# Altium PCB PCB.PcbDoc
Units mm, origin at the board's own origin, x right, y up, seen from the top; angles counter-clockwise.
Board outline 16.51 x 12.83 mm, 2 copper layers (Top Layer, Bottom Layer); 7 components, 6 nets, 26 pads, 18 vias.
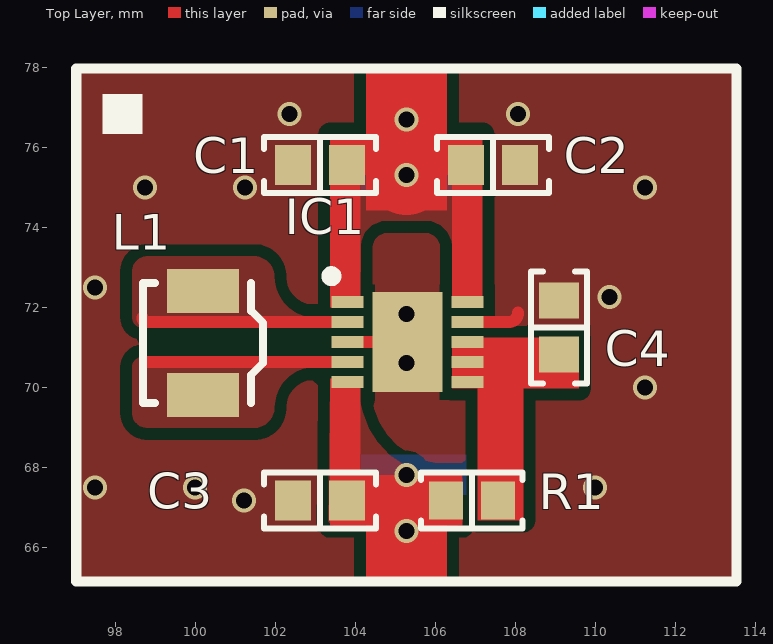
[diagram p0: Top Layer view]
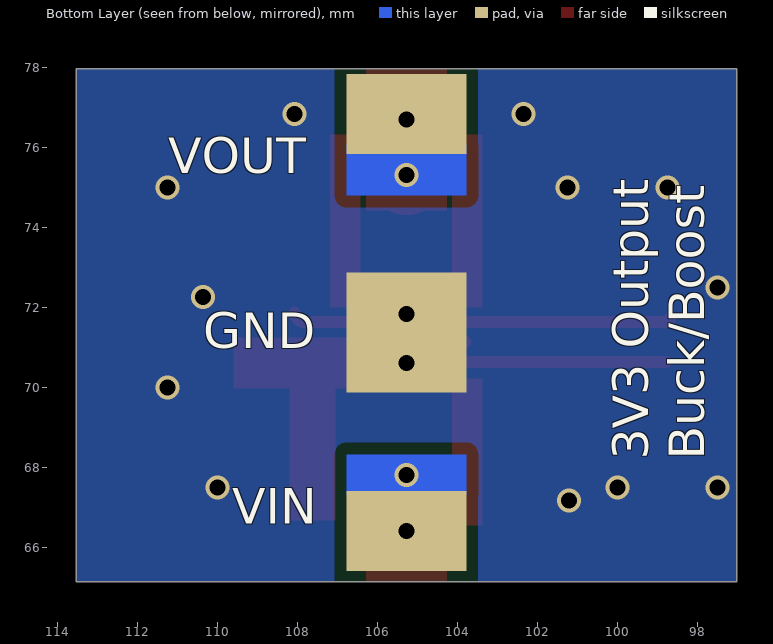
[diagram p1: Bottom Layer view, seen from below]
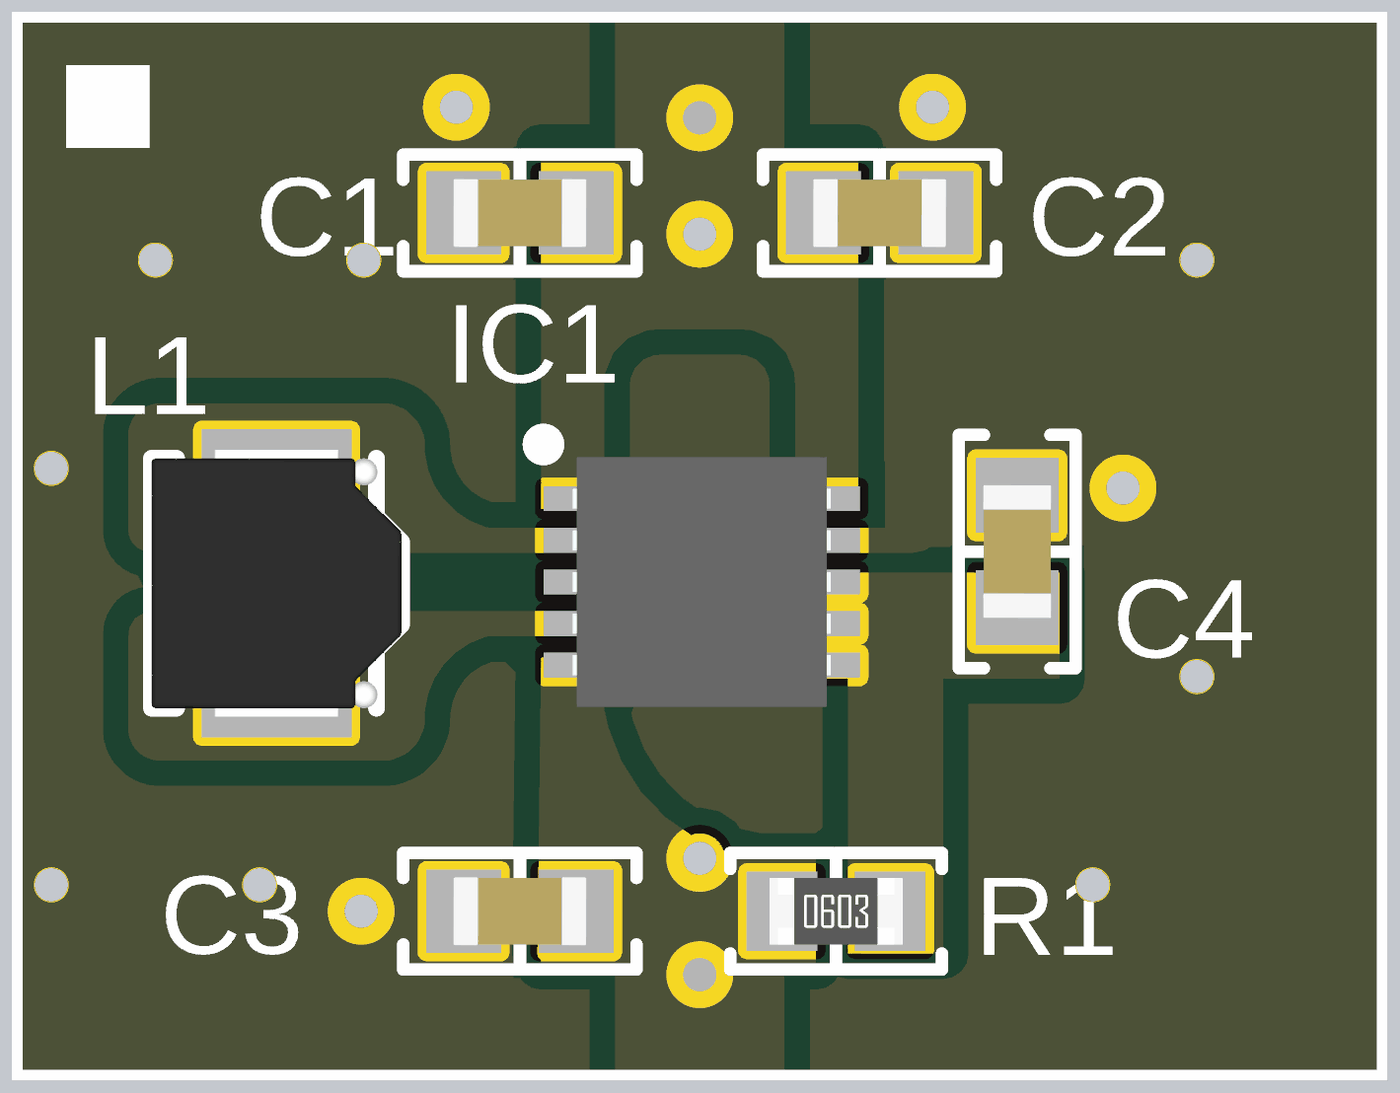
[diagram p2: 3D render of the assembled board from above, using the file's embedded part models]

## Layer stack, top to bottom
Top Solder: solder mask 0.0102, Solder Resist, Dk 3.5
Top Layer: signal copper 0.0356
Dielectric 1: dielectric 0.32, FR-4, Dk 4.8
Bottom Layer: signal copper 0.0356
Bottom Solder: solder mask 0.0102, Solder Resist, Dk 3.5

## Board outline
97.028,65.151 113.538,65.151 113.538,77.978 97.028,77.978

## Design rules (kind name [scope] priority, off if disabled: settings)
Clearance POL [All vs InPolygon] p1: gap=0.3 ignorepadtopadclearanceinfootprint=FALSE
Clearance [All] p2: gap=0.2 ignorepadtopadclearanceinfootprint=FALSE
HoleSize [All] p1: absolutevalues=TRUE maxlimit=2.54 minlimit=0.4 maxpercent=80.000 minpercent=20.000
PlaneClearance [All] p1: clearance=0.3
PlaneConnect [All] p1: planeconnectstyle=Direct reliefexpansion=0.508 reliefentries=4 reliefconductorwidth=0.254 reliefairgap=0.254
PolygonConnect [All] p1: connectstyle=Direct reliefconductorwidth=0.254 reliefentries=4 polygonreliefangle="90 Angle" airgapwidth=0.254
RoomDefinition Schematic [InComponentClass('Schematic')] p1: confinementstyle=ConfineIn formatcopy=TRUE lockcomponents=FALSE outline 93.98,64.008 115.697,64.008 115.697,81.026 93.98,81.026
RoutingVias [All] p1: holewidth=0.711 width=1.27 viastyle="Through Hole" minholewidth=0.711 minwidth=1.27 maxholewidth=0.711 maxwidth=1.27
SolderMaskExpansion [All] p1: expansion=0.102
Width [All] p1: maxlimit=2 minlimit=0.254 preferedwidth=0.3 minimp=50.000000 maximp=50.000000 favimp=50.000000
27 further rules are at their usual default settings.

## Components (designator, comment, footprint, x,y, rotation, side; value= is the part's Value field where it differs from the comment)
C1 "10µF" "CAP 0603_1608" 103.124,75.565 r0 top
C2 "10µF" "CAP 0603_1608" 107.442,75.565 r180 top
C3 "10µF" "CAP 0603_1608" 103.124,67.183 r180 top
C4 "0.1µF" "CAP 0603_1608" 109.093,71.501 r270 top
IC1 "TPS63001DRCR" SON50P300X300X100-11N-D 105.307,71.136 r0 top
L1 "2.2µH" "TDK SPM3012-LR" 100.203,71.12 r90 top
R1 "100 Ohms" "RES 0603_1608" 106.919,67.183 r0 top

## Footprints (in the part's own frame and the unit in brackets; to place one, negate y for a bottom-side part, rotate by r counter-clockwise, add the part's x,y. Pads: shape width x height; smd on the part's side, far side on the other; paste and mask are expansions set on the pad)
"CAP 0603_1608" [mm] "Chip Capacitor, 2-Leads, Body 1.60x0.80mm, IPC Medium Density"
  rect 0.9x1 smd: 1(-0.675,0) 2(0.675,0)
  silkscreen extent -1.4,-0.7 1.4,0.7, body extent -0.8,-0.41 0.8,0.41, height 0.82
"RES 0603_1608" [mm] "Chip Resistor, 2-Leads, Body 1.60x0.80mm, IPC Medium Density"
  rect 0.85x0.95 smd: 1(-0.65,0) 2(0.65,0)
  silkscreen extent -1.27,-0.7 1.27,0.7, body extent -0.8,-0.4 0.8,0.4, height 0.45
SON50P300X300X100-11N-D [mm]
  rect 0.8x0.3 smd: 1(-1.5,1) 2(-1.5,0.5) 3(-1.5,0) 4(-1.5,-0.5) 5(-1.5,-1) 6(1.5,-1) 7(1.5,-0.5) 8(1.5,0) 9(1.5,0.5) 10(1.5,1)
  rect 1.75x2.5 smd: 11(0,0)
  silkscreen extent -2.02,1.53 -1.77,1.77, body extent -1.55,-1.5 1.55,1.5, height 1
"TDK SPM3012-LR" [mm] "Inductor, 2-Leads, Body 3.00x3.00mm, IPC Medium Density"
  rect 1.1x1.8 smd: 1(-1.3,0) 2(1.3,0)
  silkscreen extent -1.5,-1.5 1.5,1.5, body extent -1.6,-1.5 1.6,1.5, height 1.2

## Part data
C1 C2 C3: library part CL10B106MQ8NRNC, "CAP CER 10UF 6.3V X7R 0603", Device Package="0603 (1608 Metric)", Manufacturer="Samsung Electro-Mechanics", Operating Temperature="-55°C ~ 125°C", Supplier Part Number 1=1276-1948-1-ND, Temperature Coefficient=X7R, Tolerance=±20%, Voltage - Rated=6.3V, Applications="General Purpose", Capacitance=10µF, ComponentLink1Description=Datasheet, ComponentLink1URL=http://www.samsungsem.com/kr/support/product-search/mlcc/CL10B106MQ8NRNC.jsp, ComponentLink2Description="DigiKey Link", ComponentLink2URL=http://digikey.com/product-detail/en/samsung-electro-mechanics/CL10B106MQ8NRNC/1276-1948-1-ND/3890034, LastUpdated="2/9/2020 1:03:24", Lifecycle Status=Active, Minimum Order=1, Mounting Type="Surface Mount, MLCC", Package / Case="0603 (1608 Metric)", Packaging=TapeAndReel, PartId=8640, Part Number=CL10B106MQ8NRNC, Part Status=Active, Price=0.24, Series=CL, Size / Dimension="0.063\" L x 0.031\" W (1.60mm x 0.80mm)", Supplier 1=DigiKey, Thickness (Max)="0.035\" (0.90mm)"
C4: library part C0603C104K8RACTU, "CAP CER 0.1UF 10V X7R 0603", Device Package="0603 (1608 Metric)", Manufacturer=KEMET, Operating Temperature="-55°C ~ 125°C", Supplier Part Number 1=399-1095-1-ND, Temperature Coefficient=X7R, Tolerance=±10%, Voltage - Rated=10V, Applications="Bypass, Decoupling", Capacitance=0.1µF, ComponentLink1Description=Datasheet, ComponentLink1URL=https://api.kemet.com/component-edge/download/datasheet/C0603C104K8RACTU.pdf, ComponentLink2Description="DigiKey Link", ComponentLink2URL=http://digikey.com/product-detail/en/kemet/C0603C104K8RACTU/399-1095-1-ND/411370, LastUpdated="2/9/2020 1:03:33", Lifecycle Status=Active, Minimum Order=1, Mounting Type="Surface Mount, MLCC", Package / Case="0603 (1608 Metric)", Packaging=TapeAndReel, PartId=3742, Part Number=C0603C104K8RACTU, Part Status=Active, Price=0.02, Series="SMD Comm X7R", Size / Dimension="0.063\" L x 0.031\" W (1.60mm x 0.80mm)", Supplier 1=DigiKey, Thickness (Max)="0.034\" (0.87mm)"
IC1: "Integrated Circuit", Manufacturer_Name="Texas Instruments", Datasheet Link=https://datasheet.lcsc.com/szlcsc/Texas-Instruments-TI-TPS63001DRCR_C28060.pdf, Height=1mm, Manufacturer_Part_Number=TPS63001DRCR
L1: library part SPM3015T-2R2M-LR, "FIXED IND 2.2UH 2.8A 86.6 MOHM", Current - Saturation=4A, Current Rating (Amps)=2.8A, DC Resistance (DCR)="86.6mOhm Max", Device Package=Nonstandard, Inductance Frequency - Test=100kHz, Manufacturer="TDK Corporation", Operating Temperature="-40°C ~ 125°C", Supplier Part Number 1=445-174449-1-ND, Tolerance=±20%, ComponentLink1Description=Datasheet, ComponentLink1URL=https://product.tdk.com/info/en/catalog/datasheets/inductor_commercial_power_spm3015-lr_en.pdf?ref_disty=digikey, ComponentLink2Description="DigiKey Link", ComponentLink2URL=http://digikey.com/product-detail/en/tdk-corporation/SPM3015T-2R2M-LR/445-174449-1-ND/5962375, Height - Seated (Max)="0.047\" (1.20mm)", Inductance=2.2µH, LastUpdated="2/9/2020 1:22:14", Lifecycle Status=Active, Material - Core=Metal, Minimum Order=1, Mounting Type="Surface Mount", Package / Case=Nonstandard, Packaging=TapeAndReel, PartId=150, Part Number=SPM3015T-2R2M-LR, Part Status=Active, Price=0.59, Series=SPM-LR, Shielding=Shielded, Size / Dimension="0.126\" L x 0.118\" W (3.20mm x 3.00mm)", Supplier 1=DigiKey, Type=Wirewound
R1: library part RNCS0603BKE100R, "RES 100 OHM 0.1% 1/16W 0603", Device Package="0603 (1608 Metric)", Manufacturer="Stackpole Electronics Inc", Operating Temperature="-55°C ~ 155°C", Power (Watts)="0.063W, 1/16W", Ratings=AEC-Q200, Supplier Device Package=0603, Supplier Part Number 1=RNCS0603BKE100RCT-ND, Temperature Coefficient=±25ppm/°C, Tolerance=±0.1%, ComponentLink1Description=Datasheet, ComponentLink1URL=https://www.seielect.com/catalog/sei-rncs_rnch.pdf, ComponentLink2Description="DigiKey Link", ComponentLink2URL=http://digikey.com/product-detail/en/stackpole-electronics-inc/RNCS0603BKE100R/RNCS0603BKE100RCT-ND/1800117, Composition="Thin Film", Features="Anti-Corrosive, Automotive AEC-Q200, Moisture Resistant", Height - Seated (Max)="0.022\" (0.55mm)", LastUpdated="2/9/2020 1:10:25", Lifecycle Status=Active, Minimum Order=1, Number of Terminations=2, Package / Case="0603 (1608 Metric)", Packaging=TapeAndReel, PartId=4839, Part Number=RNCS0603BKE100R, Part Status=Active, Price=0.08, Resistance="100 Ohms", Series=RNCS, Size / Dimension="0.061\" L x 0.031\" W (1.55mm x 0.80mm)", Supplier 1=DigiKey

## Free pads (board coordinates)
  rect 3x2 smd far side: 2(105.283,66.421) 2(105.283,76.835)
  rect 3x3 smd far side: 2(105.283,71.374)

## Via types
v1: diameter 0.6, hole 0.4, Top Layer to Bottom Layer, 10 vias
v2: diameter 0.6, hole 0.4, Top Layer to Bottom Layer, tented both sides, 8 vias

## Nets (pads, with @x,y where several pads share a name; then routed paths per layer and width w, separated by ;. In a path a pad name is that pad's centre, name@x,y a point inside that pad or via, vN(x,y) a via of type N, cw(c..) or ccw(c..) an arc to the next point about the centre after c; other vN are vias at no path point)
GND: C1.1 C2.1 C3.2 C4.1 IC1.3 IC1.9 IC1.11 pad.2@105.283,71.374 | length 2.9
  Top Layer w0.3: IC1.3 IC1.11 ; IC1.9 107.831,71.636 ccw(c107.831,71.882) 108.077,71.882
  other v1: 101.219,67.183 105.283,70.612 105.283,71.842 110.363,72.263 102.362,76.835 108.077,76.835
  other v2: 97.5,67.5 100,67.5 110,67.5 111.25,70 97.5,72.5 98.75,75 101.25,75 111.25,75
NetC1_2: C1.2 C2.2 IC1.1 IC1.10 pad.2@105.283,76.835 | length 1.9
  Top Layer w0.3: v1@105.156,75.184 ccw(c105.156,75.311) v1(105.283,75.311)
  Top Layer w2: v1(105.283,75.311) v1@105.283,76.962
  other v1: 105.283,76.708
NetC3_1: C3.1 IC1.5 pad.2@105.283,66.421 R1.1
  other v1: 105.283,66.421 105.283,67.818
NetC4_2: C4.2 IC1.6 IC1.7 IC1.8 R1.2 | length 2.3
  Top Layer w0.3: IC1.7 109.029,70.636 cw(c109.029,70.572) C4.2@109.093,70.572
NetIC1_2: IC1.2 L1.2 | length 5.2
  Top Layer w0.3: 98.679,71.755 ccw(c98.798,71.755) 98.798,71.636 103.057,71.636 IC1.2
NetIC1_4: IC1.4 L1.1 | length 5
  Top Layer w0.3: 98.798,70.636 103.057,70.636 IC1.4

## Polygon pours and split planes (outlines as drawn)
GND on Top Layer (solid, pour order 14): 97.028,77.978 113.538,77.978 113.538,65.151 97.028,65.151
NetC1_2 on Top Layer (solid, pour order 12): 104.14,72.898 104.14,73.533 cw(c104.775,73.533) 104.775,74.168 105.791,74.168 cw(c105.791,73.533) 106.426,73.533 106.426,72.898 106.807,72.898 ccw(c106.807,73.025) 106.934,73.025 106.934,75.946 103.886,75.946 cw(c103.886,76.073) 103.759,76.073 ccw(c103.759,75.819) 103.505,75.819 103.505,72.898
NetC3_1 on Top Layer (solid, pour order 10): 106.68,67.818 cw(c106.299,69.977) 104.14,69.596 104.14,69.723 103.886,69.723 ccw(c103.378,69.723) 103.378,70.231 103.332,66.548 106.68,66.548
NetIC1_4 on Top Layer (solid, pour order 2): 104.14,70.517 102.997,70.517 ccw(c102.997,69.501) 101.981,69.501 cw(c101.473,69.501) 101.473,68.993 98.806,68.993 cw(c98.806,69.374) 98.425,69.374 98.425,70.517 cw(c98.679,70.517) 98.679,70.771 104.14,70.771
NetIC1_2 on Top Layer (solid, pour order 0): 104.14,71.755 102.997,71.755 cw(c102.997,72.771) 101.981,72.771 ccw(c101.473,72.771) 101.473,73.279 98.806,73.279 ccw(c98.806,72.898) 98.425,72.898 98.425,71.755 ccw(c98.679,71.755) 98.679,71.501 104.14,71.501
GND on Bottom Layer (solid, pour order 20): 97.028,77.978 113.538,77.978 113.538,65.151 97.028,65.151

## Other copper
Top Layer:
  rectangle net NetC3_1: 104.267,65.151 106.299,67.437
  rectangle net NetC1_2: 104.267,74.422 106.299,77.978
  rectangle net NetC4_2: 107.061,66.675 108.204,70.612
  rectangle net NetC4_2: 106.426,69.977 109.601,71.247
  rectangle net NetC3_1: 103.378,66.675 104.14,70.231
  rectangle net NetC3_1: 103.378,66.548 106.68,67.818
  rectangle net NetC1_2: 106.426,72.009 107.188,76.327
  rectangle net NetC1_2: 103.505,75.311 107.188,76.327
  rectangle net NetC1_2: 103.378,72.009 104.14,76.327
Bottom Layer:
  region net NetC1_2: 106.786,76.073 103.786,76.073 103.786,74.803 106.786,74.803
  rectangle net NetC3_1: 103.78,67.31 106.78,68.326
  region: 103.886,67.31

## Silkscreen, mask and mechanical layers (free items; w line width, h text height)
Top Overlay:
  rectangle: 97.679,76.343 98.679,77.343
  lines w0.254: 97.028,65.151 105.283,65.151 113.538,65.151 113.538,77.978 105.283,77.978 97.028,77.978 97.028,65.151
Bottom Overlay:
  text "VOUT" at 111.232,75.057 h1.52
  text "GND" at 110.363,70.684 h1.52
  text "Buck/Boost" at 97.536,68.199 h1.52 r270
  text "3V3 Output" at 98.933,68.199 h1.52 r270
  text "VIN" at 109.636,66.294 h1.52
Mechanical 15:
  the board outline again, w0.254